# EAGLE board base (EAGLE 9.0.1)
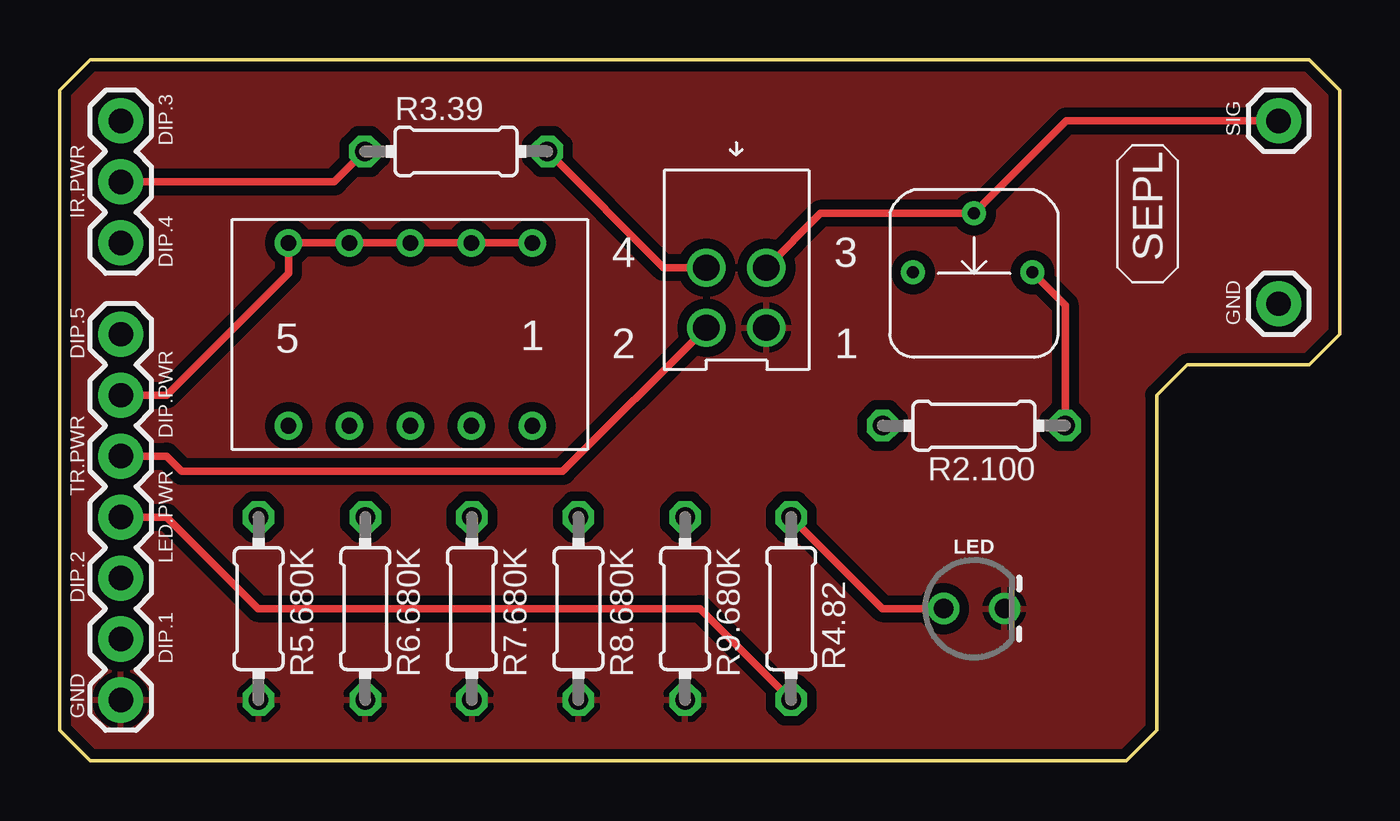
[diagram p0: board, top side]
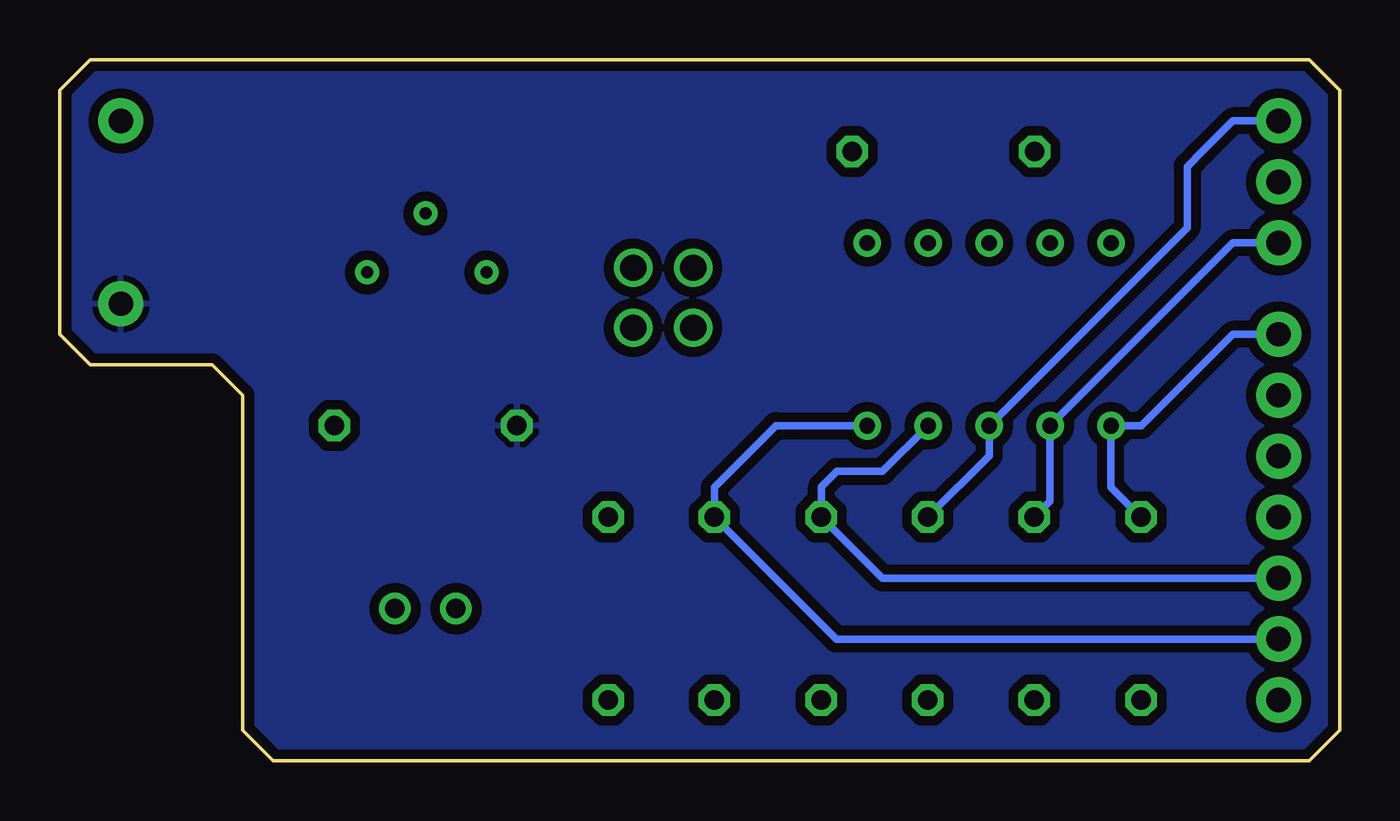
[diagram p1: board, bottom side, seen from below]

Size 53.34 x 29.21 mm. Coordinates in mm from the lower left corner, seen from the top.
Outline: 1.27,29.21 52.07,29.21 53.34,27.94 53.34,17.78 52.07,16.51 46.99,16.51 45.72,15.24 45.72,1.27 44.45,0 1.27,0 0,1.27 0,27.94 1.27,29.21
Copper layers (1*16): Top 0.035mm / dielectric 1.5mm / Bottom 0.035mm
Design rules "aisler_go_2layer *": minimum track width 0.1mm, minimum drill 0.2mm, track to track 0.1mm, track to pad 0.1mm, pad to pad 0.1mm, via to via 0.1mm, smd to smd 0.1mm, copper to edge 0.2mm, drill to drill 0.21mm, minimum pad ring 0.25mm, minimum via ring 0.05mm, stop-mask expansion 0.01mm, vias tented up to drill 0mil, thermal gap 10mil

## Footprints (pad centres in the part's own frame; a part is rotated, then mirrored left to right if it is on the bottom)
1X07 = drill 1.016 pad 1.88: 1 0,0; 2 2.54,0; 3 5.08,0; 4 7.62,0; 5 10.16,0; 6 12.7,0; 7 15.24,0
1X03 = drill 1.016 pad 1.88: 1 0,0; 2 2.54,0; 3 5.08,0
1X01 = drill 1.016 pad 1.88: 1 0,0
LED_3MM-NS = drill 0.813: A -1.27,0; K 1.27,0
0204/7 = drill 0.813 octagon: 1 -3.81,0; 2 3.81,0
DF1BZ-4DP-2.5DS = drill 1.1: 1 -1.25,1.25; 2 1.25,1.25; 3 -1.25,-1.25; 4 1.25,-1.25
DIP-SW-CTS-208-5 = drill 0.65: 1_OFF 0,-7.62; 1_ON 0,0; 2_OFF 2.54,-7.62; 2_ON 2.54,0; 3_OFF 5.08,-7.62; 3_ON 5.08,0; 4_OFF 7.62,-7.62; 4_ON 7.62,0; 5_OFF 10.16,-7.62; 5_ON 10.16,0
CT6EP103 = drill 0.5: 1 2.44,0.04; 2 0,2.5; 3 -2.54,0.04

## Placement (x,y rotation side)
J1  [1X07]  2.54,17.78 270 top
J2  [1X03]  2.54,26.67 270 top
J3  [1X01]  50.8,19.05 0 top
J4  [1X01]  50.8,26.67 0 top
LED  [LED_3MM-NS]  38.1,6.35 0 top
R2.100  [0204/7]  38.1,13.97 180 top
R3.39  [0204/7]  16.51,25.4 0 top
R4.82  [0204/7]  30.48,6.35 90 top
R5.680K  [0204/7]  8.28,6.35 270 top
R6.680K  [0204/7]  12.73,6.35 270 top
R7.680K  [0204/7]  17.17,6.35 270 top
R8.680K  [0204/7]  21.62,6.35 270 top
R9.680K  [0204/7]  26.06,6.35 270 top
U$1  DF1BZ-4DP-2.5DS  [DF1BZ-4DP-2.5DS]  28.19,19.3 180 top
U$2  DIP-SW-CTS-208-5  [DIP-SW-CTS-208-5]  19.69,13.97 180 top
U$3  CT6EP103  [CT6EP103]  38.1,20.32 0 top

## Library data of the parts
J1 J3 J4 = SparkFun-Connectors
J2 = SparkFun-Connectors; PROD_ID: XXX-00000
LED = SparkFun-LED
R2.100 R3.39 R4.82 R5.680K R6.680K R7.680K R8.680K R9.680K = rcl; SPICEPREFIX: R
U$1-U$3 = ferraris_sensor_project

## Nets
DIP_1: J1.6 R9.680K.1 U$2.1_ON
DIP_2: J1.5 R8.680K.1 U$2.2_ON
DIP_3: J2.1 R7.680K.1 U$2.3_ON
DIP_4: J2.3 R6.680K.1 U$2.4_ON
DIP_5: J1.1 R5.680K.1 U$2.5_ON
DIP_PWR: J1.2 U$2.1_OFF U$2.2_OFF U$2.3_OFF U$2.4_OFF U$2.5_OFF
GND_A: J3.1 R2.100.2
GND_D: J1.7 LED.K R5.680K.2 R6.680K.2 R7.680K.2 R8.680K.2 R9.680K.2 U$1.1
IR_PWR: J2.2 R3.39.1
LED_PWR: J1.4 R4.82.1
N$1: R2.100.1 U$3.1
N$2: R3.39.2 U$1.4
N$3: LED.A R4.82.2
P$1: U$3.3
SIG: J4.1 U$1.3 U$3.2
TR_PWR: J1.3 U$1.2

## Tracks (layer width: path | path; a pad name or v marks a point on that pad's centre or on a via)
DIP_1
  Bottom 0.305: J1.6 20.98,5.08 R9.680K.1 26.06,11.4 23.5,13.97 U$2.1_ON
DIP_2
  Bottom 0.305: J1.5 19.05,7.62 21.59,10.16 R8.680K.1 21.59,10.18 21.59,11.43 20.95,12.06 19.05,12.06 U$2.2_ON
DIP_3
  Bottom 0.305: J2.1 4.45,26.67 5.71,25.4 6.35,24.76 6.35,22.22 U$2.3_ON 14.61,12.72 R7.680K.1
DIP_4
  Bottom 0.305: J2.3 4.45,21.59 U$2.4_ON 12.07,10.82 R6.680K.1
DIP_5
  Bottom 0.305: J1.1 4.45,17.78 8.26,13.97 U$2.5_ON 9.52,11.4 R5.680K.1
DIP_PWR
  Top 0.305: J1.2 4.45,15.24 9.52,20.32 U$2.5_OFF U$2.4_OFF U$2.3_OFF U$2.2_OFF U$2.1_OFF
GND_A
  pour Bottom (isolate 0.406): 1.27,29.21 52.07,29.21 53.34,27.94 53.34,17.78 52.07,16.51 46.99,16.51 45.72,15.24 45.72,1.27 44.45,0 1.27,0 0,1.27 0,27.94
GND_D
  pour Top (isolate 0.406): 1.27,29.21 52.07,29.21 53.34,27.94 53.34,17.78 52.07,16.51 46.99,16.51 45.72,15.24 45.72,1.27 44.45,0 1.27,0 0,1.27 0,27.94
IR_PWR
  Top 0.305: J2.2 8.26,24.13 11.43,24.13 R3.39.1
LED_PWR
  Top 0.305: R4.82.1 26.67,6.35 8.26,6.35 4.45,10.16 J1.4
N$1
  Top 0.305: U$3.1 41.91,18.99 R2.100.1
N$2
  Top 0.305: U$1.4 25.17,20.55 R3.39.2
N$3
  Top 0.305: R4.82.2 34.29,6.35 LED.A
SIG
  Top 0.305: J4.1 41.95,26.67 U$3.2 31.71,22.82 U$1.3
TR_PWR
  Top 0.305: U$1.2 20.95,12.06 5.08,12.06 4.45,12.7 J1.3

## Text on the board
tNames: DIP.3 | SIG | IR.PWR | DIP.4 | SEPL | GND | DIP.5 | DIP.PWR | TR.PWR | LED.PWR | DIP.2 | DIP.1 | GND